# Altium PCB Power.PcbDoc (part 1 of 2)
Units mil, origin at the board's own origin, x right, y up, seen from the top; angles counter-clockwise.
Board outline 3000 x 2825 mil, 4 copper layers (Top Layer, Layer 1, Layer 2, Bottom Layer), stack 26.556 mil thick; 35 components, 15 nets, 160 pads, 64 vias.
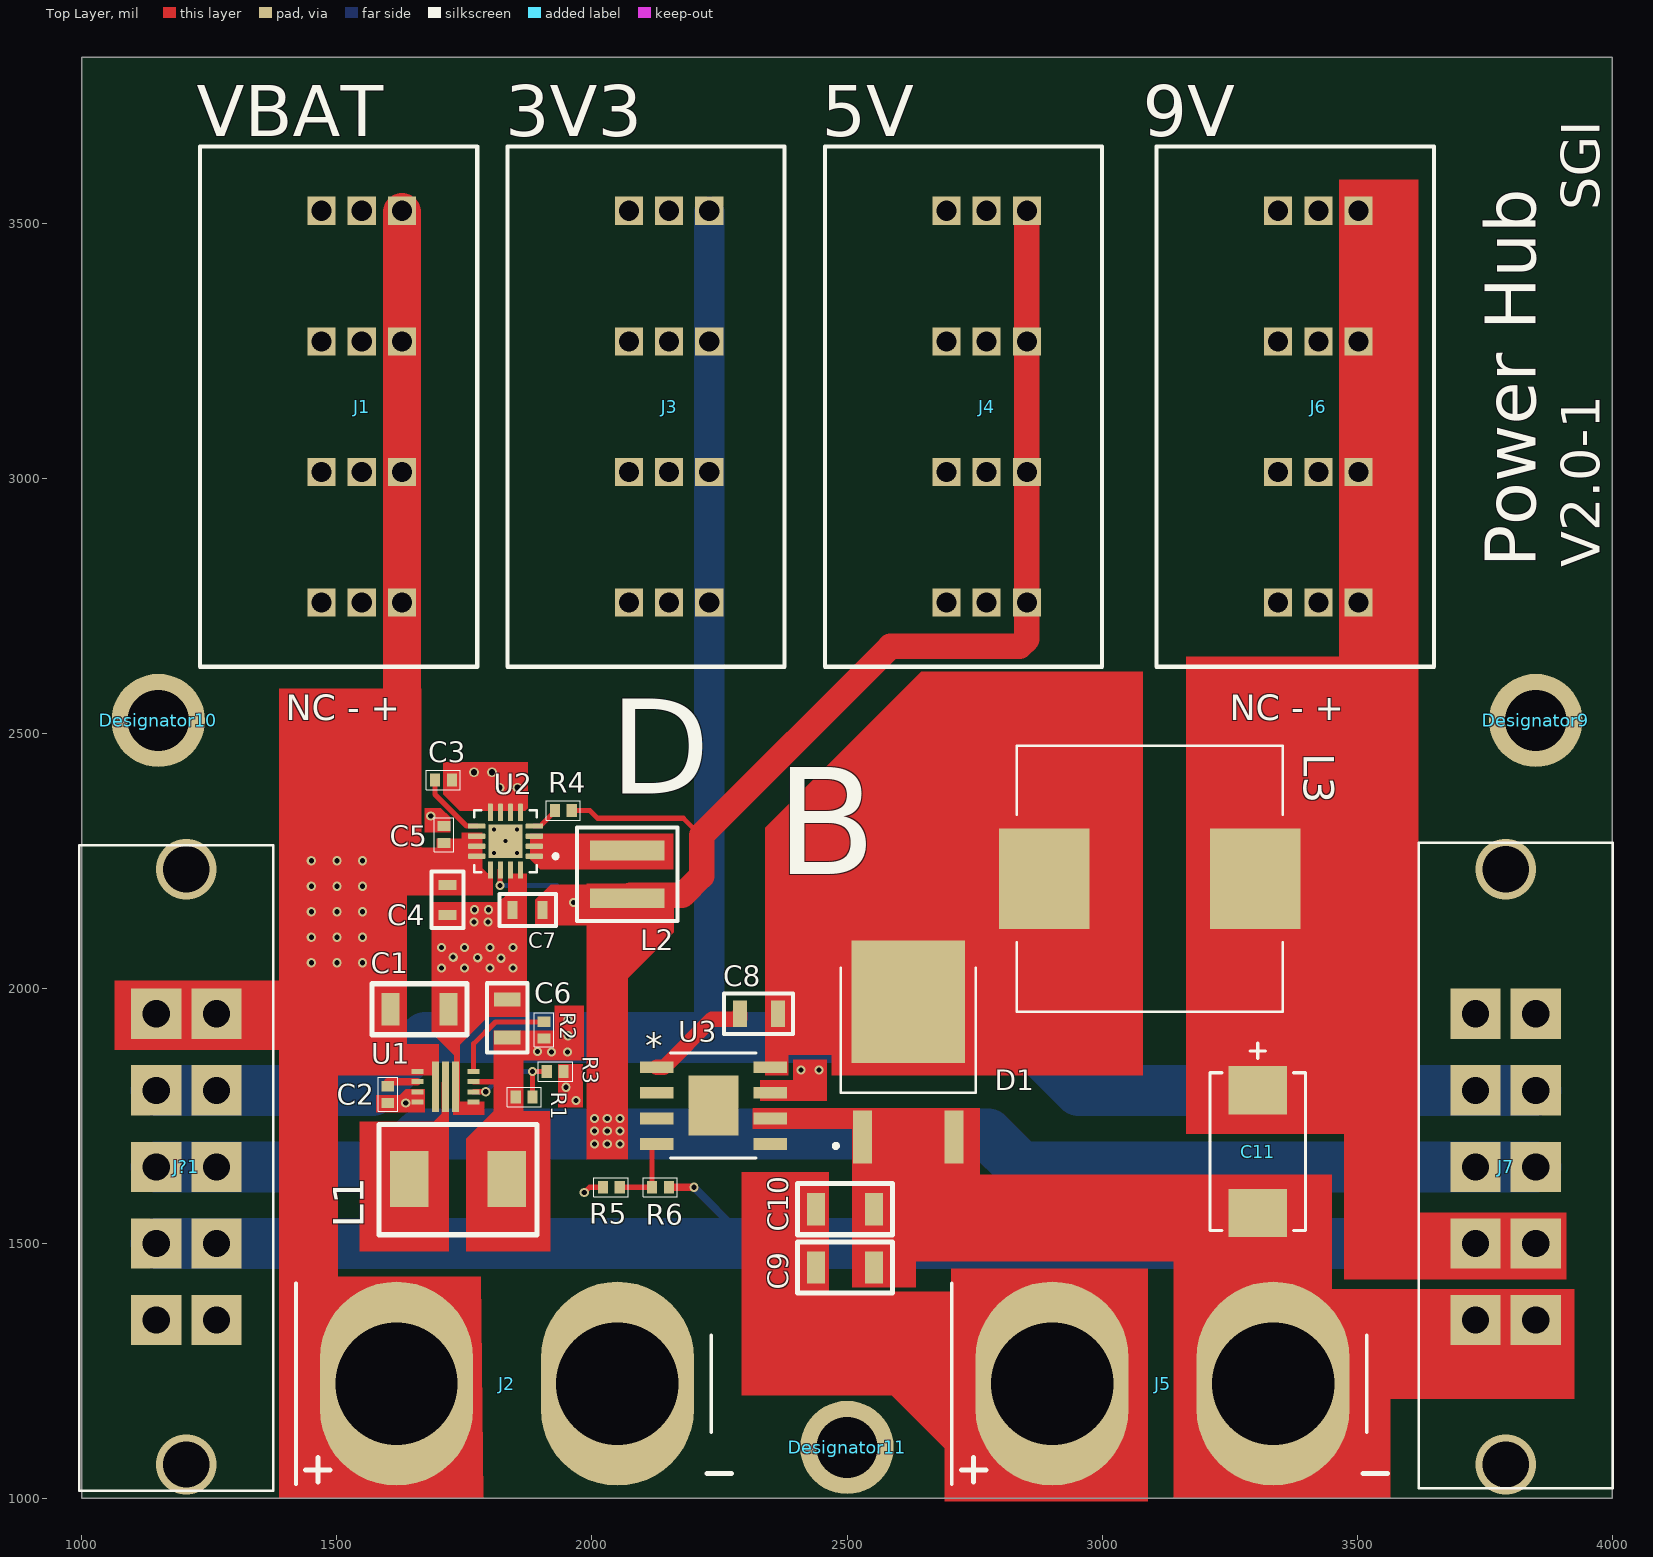
[diagram p0: Top Layer view]
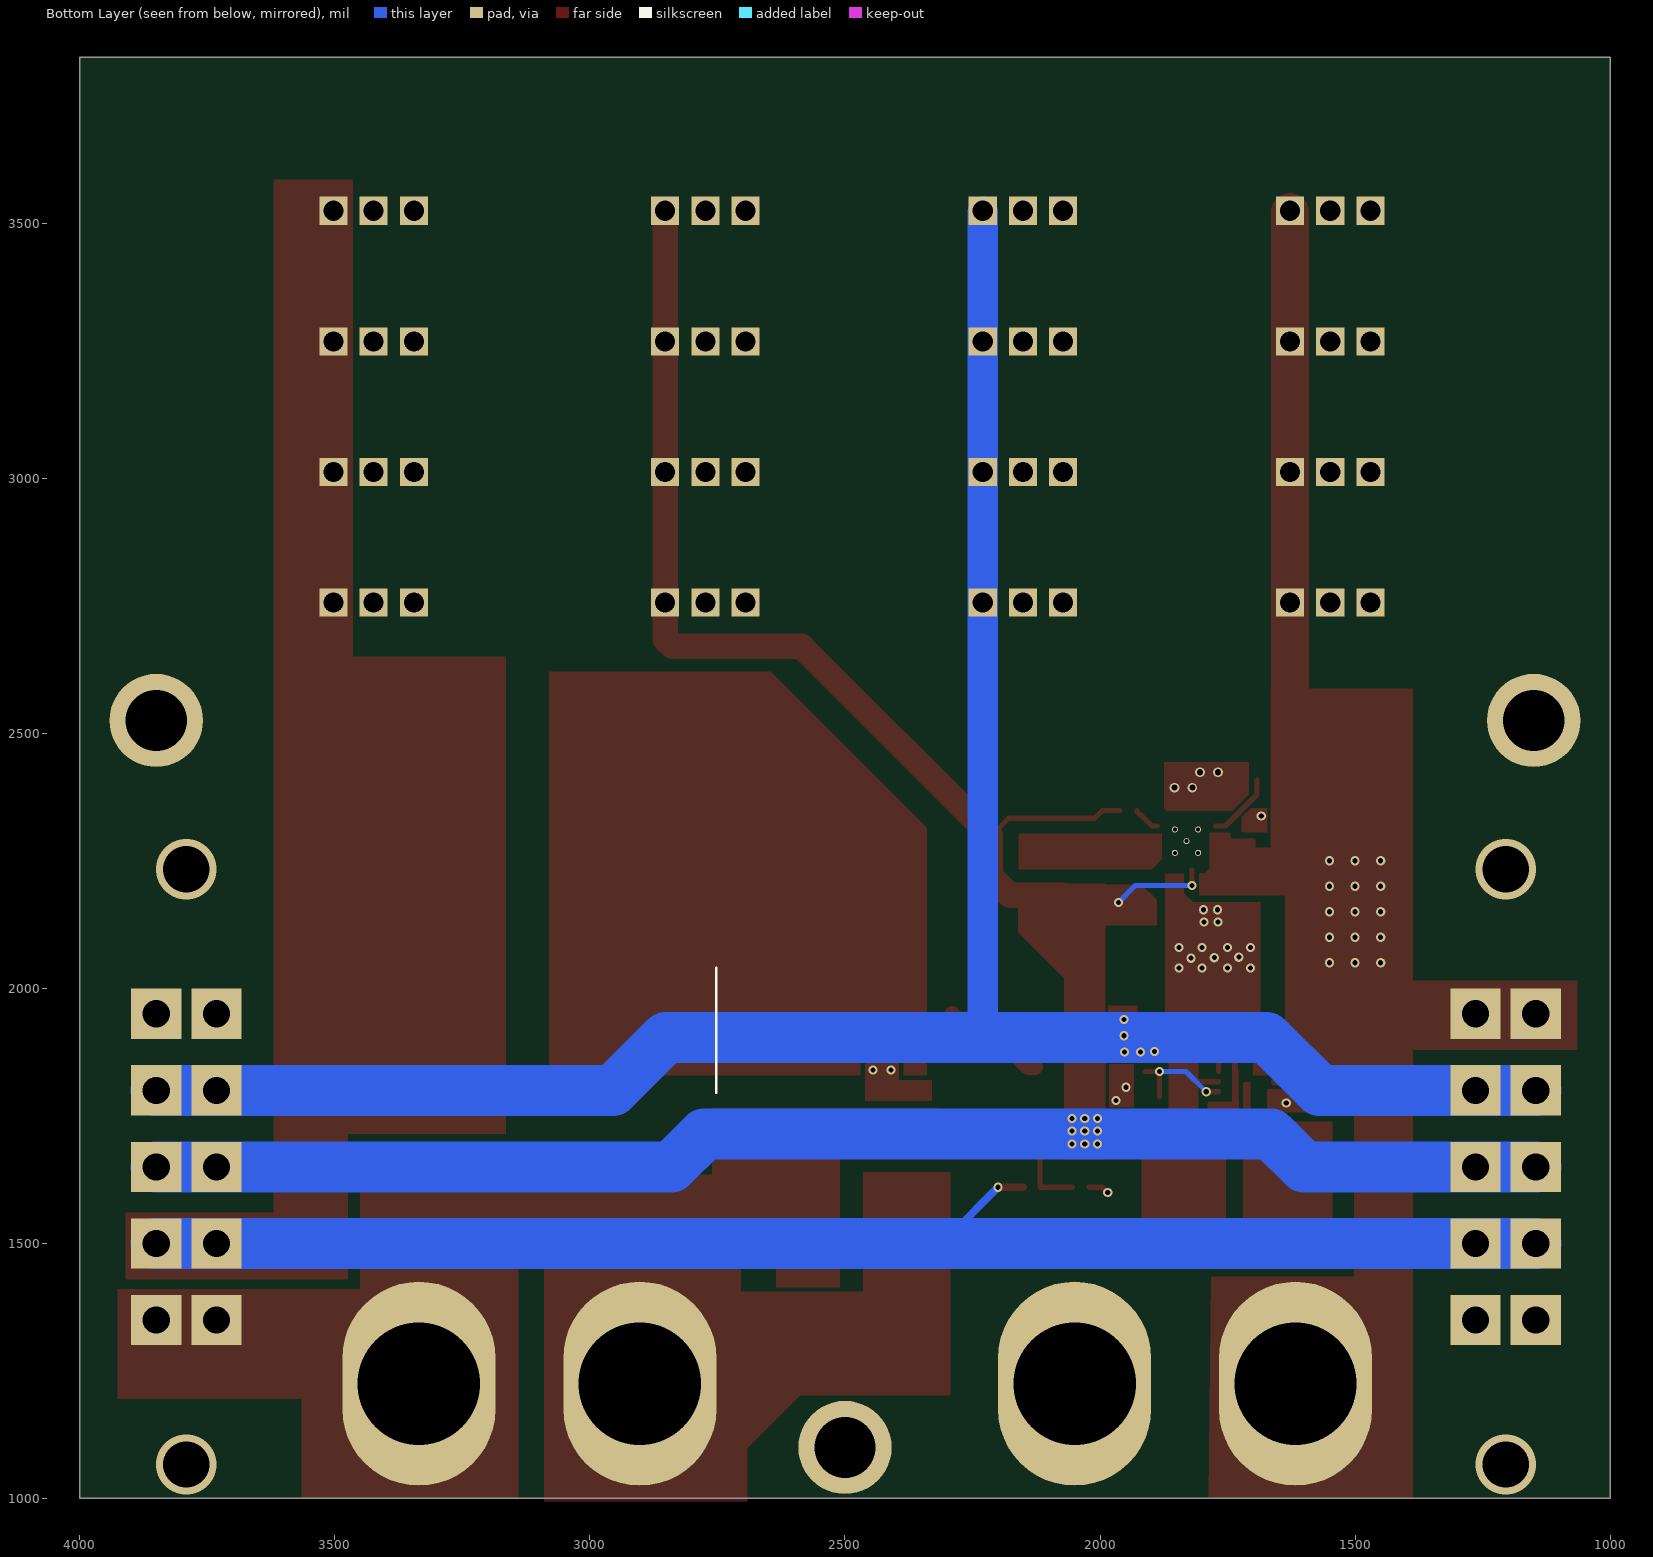
[diagram p1: Bottom Layer view, seen from below]
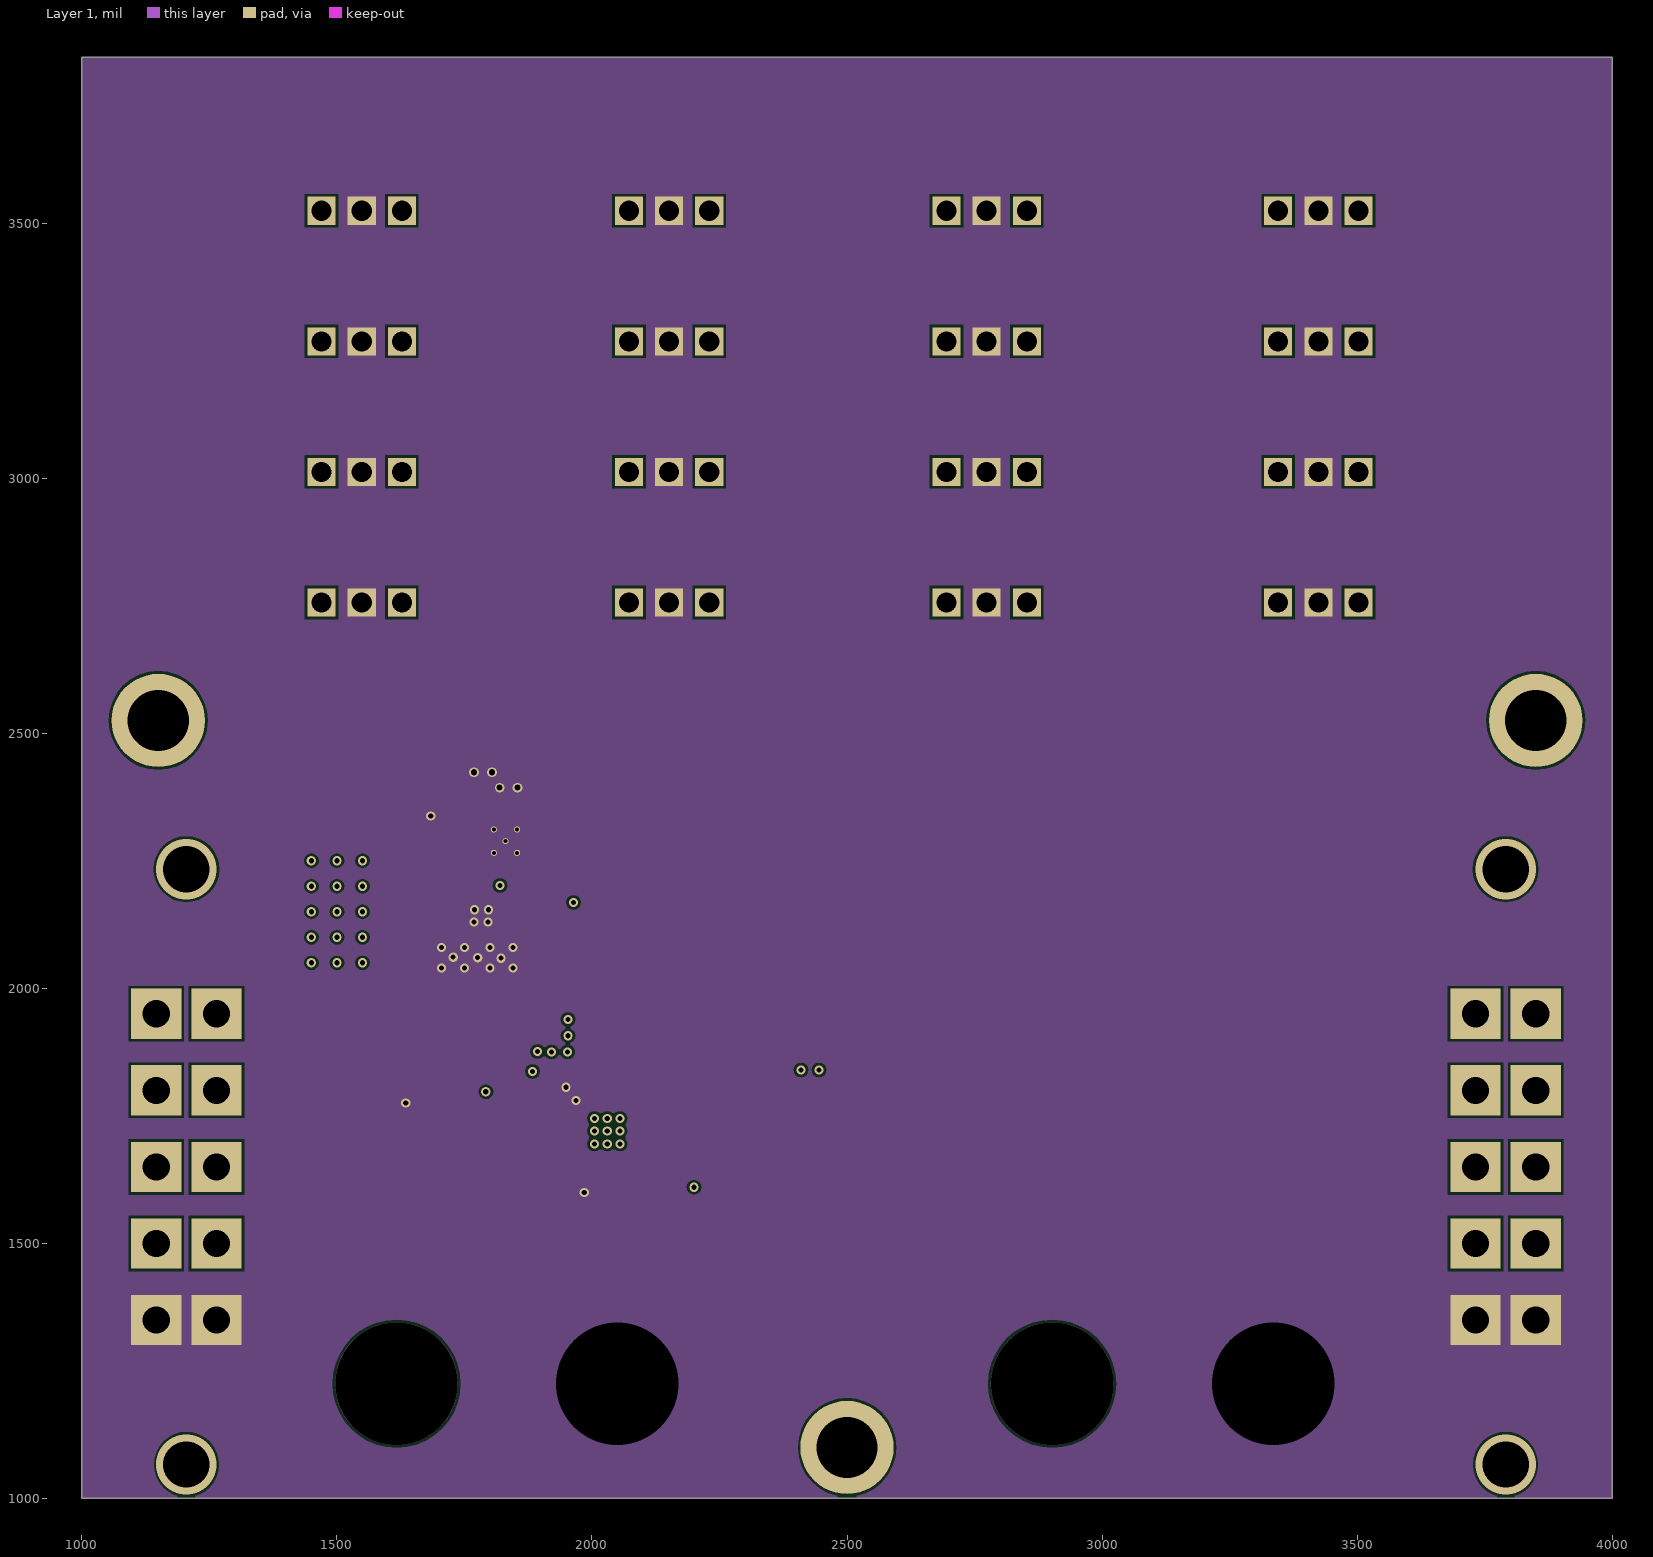
[diagram p2: Layer 1]
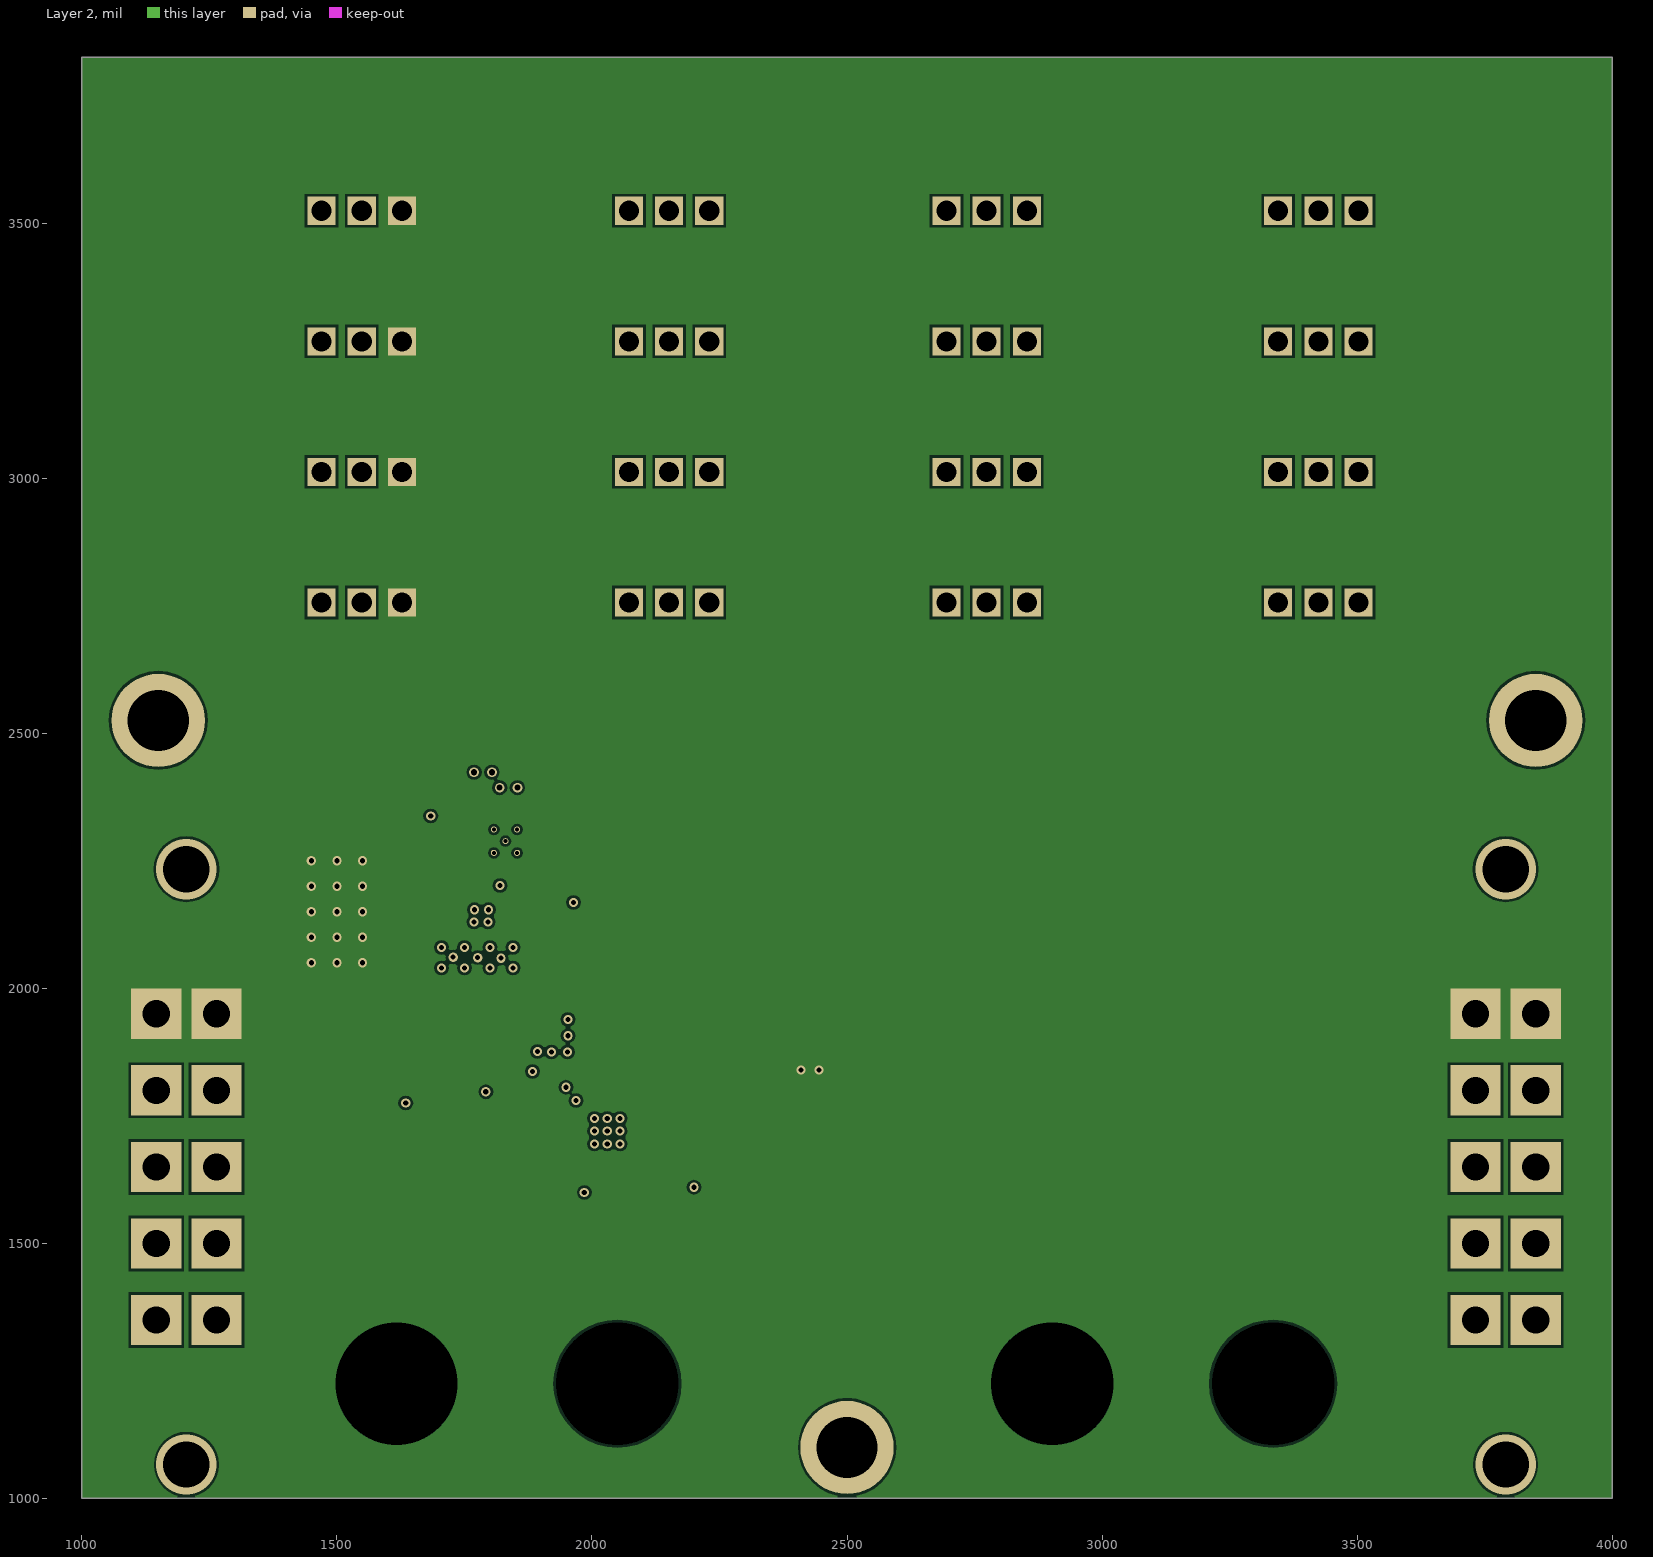
[diagram p3: Layer 2]
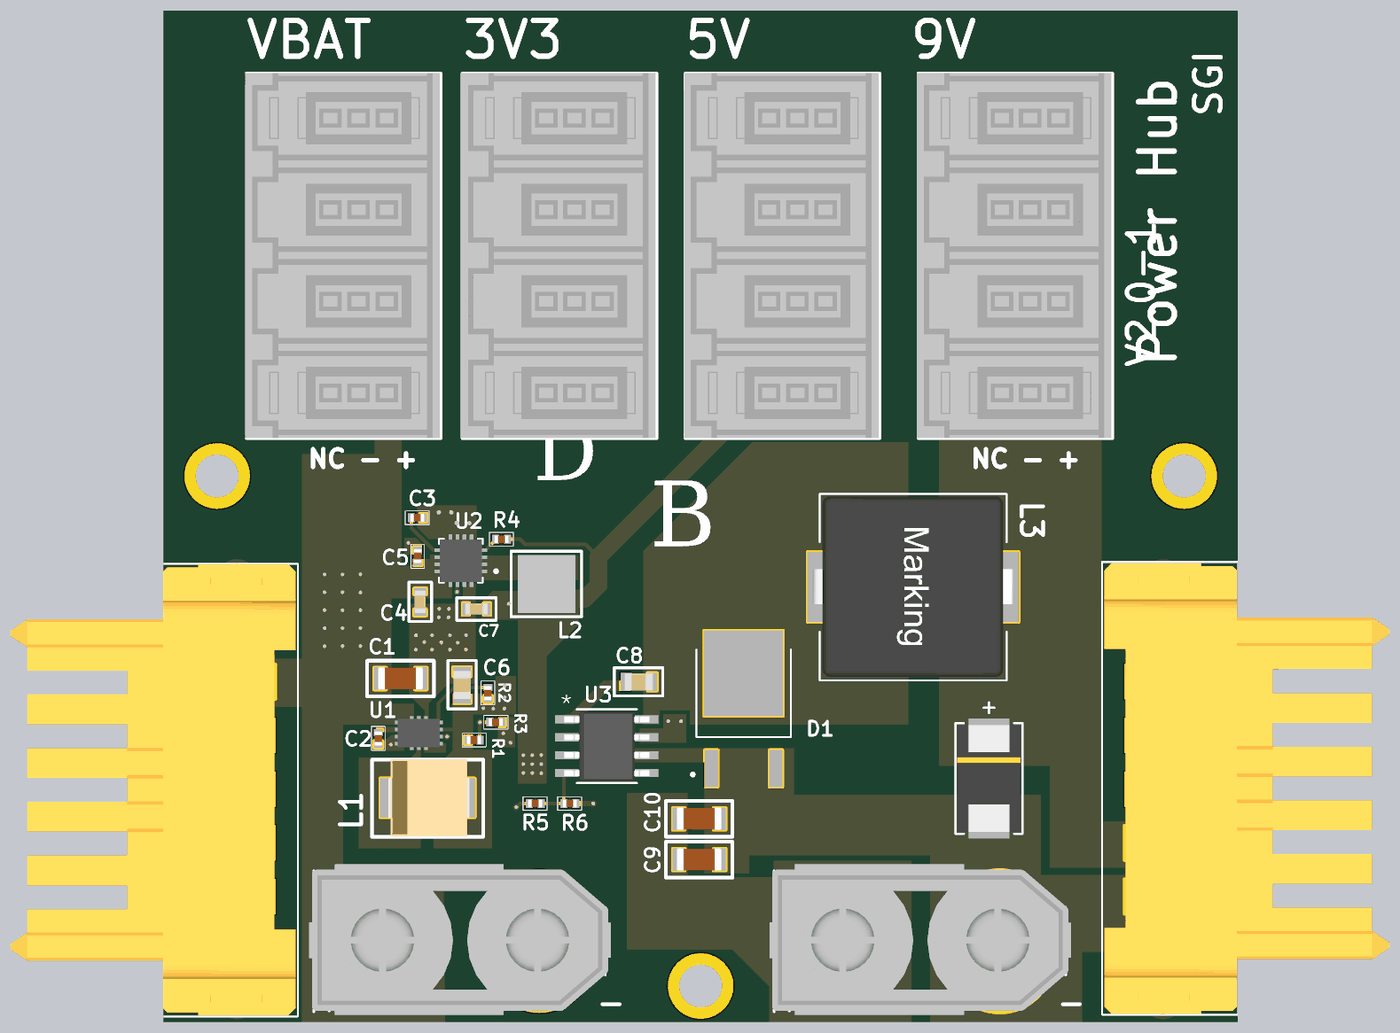
[diagram p4: 3D render of the assembled board from above, using the file's embedded part models]

## Layer stack, top to bottom
Top Solder: solder mask 0.4, Solder Resist, Dk 3.5
Top Layer: signal copper 2.8
Dielectric 2: prepreg 2.8, PP-006, Dk 4.1
Layer 1: signal copper 1.378
Dielectric 1: dielectric 12.6, FR-4, Dk 4.8
Layer 2: signal copper 1.378
Dielectric 3: prepreg 2.8, PP-006, Dk 4.1
Bottom Layer: signal copper 2.8
Bottom Solder: solder mask 0.4, Solder Resist, Dk 3.5

## Board outline
1000,3825 4000,3825 4000,1000 1000,1000

## Design rules (kind name [scope] priority, off if disabled: settings)
Clearance [All] p1: gap=5 ignorepadtopadclearanceinfootprint=FALSE except(0: Arc-Hole Track-Hole SMDPad-Hole THPad-Hole Via-Hole Fill-Hole Poly-Hole Region-Hole Text-Hole)
HoleSize [All] p1: absolutevalues=TRUE maxlimit=500 minlimit=1 maxpercent=80.000 minpercent=20.000
MinimumSolderMaskSliver [All] p1: minsoldermaskwidth=5
PlaneConnect [All] p1: planeconnectstyle=Direct reliefexpansion=20 reliefentries=4 reliefconductorwidth=10 reliefairgap=10
PolygonConnect [All] p1: connectstyle=Direct reliefconductorwidth=10 reliefentries=4 polygonreliefangle="90 Angle" airgapwidth=10
RoutingVias [All] p1: holewidth=28 width=50 viastyle="Through Hole" minholewidth=28 minwidth=50 maxholewidth=28 maxwidth=50
SilkToSilkClearance [All] p1: silktosilkclearance=5
SilkToSolderMaskClearance [IsPad] p1: minsilkscreentomaskgap=5 clearancetoexposedcopper=TRUE
SolderMaskExpansion [All] p1: expansion=4
Width [All] p1: maxlimit=200 minlimit=10 preferedwidth=10
25 further rules are at their usual default settings.

## Classes and differential pairs
component class U_9V_Switch: C8 C9 C11 D1 L3 R6 U3
component class U_5V_Switch: C3 C5 L2 R4 U2
component class U_3V_Switch: C2 C6 L1 R1 R2 R3 U1
component class Top: J2 J3 J5 J6 J?1

## Components (designator, comment, footprint, x,y, rotation, side; value= is the part's Value field where it differs from the comment)
C1 "10uF" 1206 1662,1959 r180 top (schematic designator C2)
C2 "2.2nF" 0402 1600,1791.54 r90 top (schematic designator C3)
C3 "620pF" 0402 1709,2408.35 r180 top (schematic designator C7)
C4 "10uF" 0603 1717,2173.35 r90 top (schematic designator C5)
C5 ".1uF" 0402 1710,2301.35 r270 top (schematic designator C6)
C6 "22uF" 0805 1834,1941 r270 top (schematic designator C1)
C7 "22uF" 0603 1874,2153.35 r0 top (schematic designator C4)
C8 "10nF" 0805 2327.4,1950 r0 top
C9 "10uF" 1206 2496,1453 r180 top
C10 "10uF" 1206 2496,1567 r180 top
C11 "150 uF" PCAP_TPB_D3L_PAN 3305,1680 r270 top
D1 "SBRD10200TR" SBRD10200TR 2620,1875 r0 top
Designator9 "Comment" "4-40 THRU"#1 3850,2525 r0 top
Designator10 "Comment" "4-40 THRU"#1 1150,2525 r0 top
Designator11 "Comment" "4-40 THRU"#2 2516,1110 r0 top
J1 "PWR4x1V" 37212-62M3-003PL 1231.81,3650 r270 top (schematic designator J7)
J2 "XT90 Conn" XT90 1616.93,1225 r0 top
J3 "PWR4x1V" 37212-62M3-003PL 1834.33,3650 r270 top (schematic designator J4)
J4 "PWR4x1V" 37212-62M3-003PL 2456.81,3650 r270 top (schematic designator J5)
J5 "XT90 Conn" XT90 2901.93,1225 r0 top (schematic designator J1)
J6 "PWR4x1V" 37212-62M3-003PL 3106.81,3650 r270 top
J7 "JPower" FX30B-5P-3.81DS 3790.94,1650 r90 top (schematic designator J3)
J?1 "JPower" FX30B-5P-3.81DS 1205,1650 r270 top (schematic designator J?)
L1 "1.5uH" IHLP-2020CZ-01 1737.5,1625.84 r0 top
L2 "2.2uH" 74438357022 2069,2223.35 r270 top
L3 "15.4uH" 7443551151 3093.31,2215 r0 top
R1 "374K" 0402 1867,1787 r0 top
R2 "100K" 0402 1906,1918 r90 top
R3 "100K" 0402 1928,1837 r0 top
R4 "100K" 0402 1944,2348.35 r180 top
R5 "1.58K" 0402 2038,1610 r180 top (schematic designator R6)
R6 "10K" 0402 2134.54,1610 r180 top (schematic designator R5)
U1 "TPS621361RGXR" RGX0011A 1713,1807 r90 top
U2 "TPS62133AQRGTRQ1" QFN50P300X300X100-17N 1830.54,2288.35 r180 top
U3 "TPS5450QDDARQ1" DDA8_3X2P49 2238,1770 r0 top

## Footprints (in the part's own frame and the unit in brackets; to place one, negate y for a bottom-side part, rotate by r counter-clockwise, add the part's x,y. Pads: shape width x height; smd on the part's side, far side on the other; paste and mask are expansions set on the pad)
"4-40 THRU"#1 [mil]
  round 183 hole 120: 1(0,0)
"4-40 THRU"#2 [mil]
  round 183 hole 120: 1(-16,-10)
0402 [mm]
  rect 0.508x0.63 smd: 1(-0.42,0) 2(0.42,0)
  silkscreen extent -0.84,-0.48 0.86,0.48, body extent -0.5,-0.28 0.5,0.28, height 0.51
0603 [mm]
  rect 0.5x0.9 smd: 1(-0.75,0) 2(0.75,0)
  silkscreen extent -1.4,-0.8 1.4,0.8, body extent -0.8,-0.4 0.8,0.4, height 0.81
0805 [mm]
  rect 0.7x1.3 smd: 1(-0.95,0) 2(0.95,0)
  silkscreen extent -1.75,-1 1.7,1, body extent -1,-0.63 1,0.62, height 0.61
1206 [mil]
  rect 35x63 smd: 1(-57,0) 2(57,0)
  silkscreen extent -93,-50 93,50, body extent -63,-32 63,31, height 63
37212-62M3-003PL [mm]
  rect 1.398x1.398 hole 1: 1(3.2,10.05) 2(3.2,8.05) 3(3.2,6.05) 4(9.7,10.05) 5(9.7,8.05) 6(9.7,6.05) 7(16.2,10.05) 8(16.2,8.05) 9(16.2,6.05) 10(22.7,10.05) 11(22.7,8.05) 12(22.7,6.05)
  silkscreen extent 0,0 25.9,13.8, body extent -0.02,-0.1 25.88,13.7, height 13.01
7443551151 [mm]
  rect 4.5x5 smd: 1(-5.25,0) 2(5.25,0)
  silkscreen extent -6.63,-6.63 6.63,6.6, body extent -7.13,-6.37 7.07,6.43, height 6.21
74438357022 [mm]
  rect 0.98x3.7 smd: 1(-1.185,0) 2(1.185,0)
  silkscreen extent -2.32,-2.5 2.33,2.5, body extent -2.05,-2.02 2.05,2.08, height 3.11
DDA8_3X2P49 [mil]
  rect 65.5x23 smd paste+0 mask+0: 1(-111.25,75) 2(-111.25,25) 3(-111.25,-25) 4(-111.25,-75) 5(111.25,-75) 6(111.25,-25) 7(111.25,25) 8(111.25,75)
  rect 98x118 smd paste-58.5 mask+0: EPAD(0,0)
  silkscreen extent -84,-103 84,103, body extent -119,-96 119,96, height 58
FX30B-5P-3.81DS [mm]
  rect 2.5x2.5 hole 1.35: 1(-7.62,-1.5) 1(-7.62,1.5) 2(-3.81,-1.5) 2(-3.81,1.5) 3(0,1.5) 3(0,-1.5) 4(3.81,-1.5) 4(3.81,1.5) 5(7.62,-1.5) 5(7.62,1.5)
  silkscreen extent -16,-5.33 16.13,4.32, body extent -15.95,-16.03 16.05,4.17, height 11.02
IHLP-2020CZ-01 [mil]
  rect 75x110 smd: 1(-95.5,0) 2(95.5,0)
  silkscreen extent -155,-109 155,107, body extent -109,-107 117,107, height 120
PCAP_TPB_D3L_PAN [mil]
  rect 94.5x114 smd paste+0 mask+0: 1(-120.25,0) 2(120.25,0)
  silkscreen extent -212,-94 155,94, body extent -149,-89 149,89, height 118
QFN50P300X300X100-17N [mm]
  rrect25% 0.86x0.26 smd mask+0: 1(-1.435,0.75) 2(-1.435,0.25) 3(-1.435,-0.25) 4(-1.435,-0.75) 9(1.435,-0.75) 10(1.435,-0.25) 11(1.435,0.25) 12(1.435,0.75)
  rrect25% 0.26x0.86 smd mask+0: 5(-0.75,-1.435) 6(-0.25,-1.435) 7(0.25,-1.435) 8(0.75,-1.435) 13(0.75,1.435) 14(0.25,1.435) 15(-0.25,1.435) 16(-0.75,1.435)
  rect 1.68x1.68 smd paste-2 mask+0: 17(0,0)
  round 0.3 hole 0.2: 17_1(0,0) 17_2(0.58,0.58) 17_3(0.58,-0.58) 17_4(-0.58,-0.58) 17_5(-0.58,0.58)
  silkscreen extent -2.59,-1.55 1.55,1.55, body extent -1.5,-1.5 1.5,1.5, height 1.01
RGX0011A [mm]
  rect 2.5x0.35 smd paste-1.237 mask-0.051: 1(0,0.5) 2(0,0) 3(0,-0.5)
  rect 0.25x0.6 smd paste+0 mask+0: 4(-0.75,-1.4) 5(-0.25,-1.4) 6(0.25,-1.4) 7(0.75,-1.4) 8(0.75,1.4) 9(0.25,1.4) 10(-0.25,1.4) 11(-0.75,1.4)
  body extent -1,-1.5 1,1.5, height 1.01
SBRD10200TR [mm]
  rect 0.95x2.64 smd: 1(-2.286,-4.24) 3(2.286,-4.24)
  rect 5.63x6.09 smd: 2(0,2.51)
  silkscreen extent -3.71,-4.77 3.35,4.19
XT90 [mil]
  oval 300x400 / inner round 50 / far side oval 300x400 hole 240: 1(0,0)
  oval 300x400 / inner round 150 / far side oval 300x400 hole 240: 2(433.07,0)
  silkscreen extent -197,-197 657,197, body extent -210,-206 633,216, height 827

## Part data
C1 C9 C10: library part GRM31CR71E106KA12L, "CAP CER 10UF 25V X7R 1206", Case/Package=0603, Case Code (Metric)=1608, Dielectric=X5R, Dielectric Material=Ceramic, Max Operating Temperature=85°C, Min Operating Temperature=-55°C, Package Quantity=1, Supplier Part Number 1=490-6518-1-ND, Tolerance=20%, Voltage Rating=25V, Capacitance=10uF, Case Code (Imperial)=0603, ComponentLink1Description=http://components.arrow.com/part/dataview/0323_06887183?src-supplier=Arrow+Europe, ComponentLink1URL=http://components.arrow.com/part/dataview/0323_06887183?src-supplier=Arrow+Europe, ComponentLink2Description=http://www.farnell.com/datasheets/2792994.pdf?src-supplier=Farnell, ComponentLink2URL=http://www.farnell.com/datasheets/2792994.pdf?src-supplier=Farnell, ComponentLink3Description=http://www.farnell.com/datasheets/2291921.pdf?src-supplier=Avnet, ComponentLink3URL=http://www.farnell.com/datasheets/2291921.pdf?src-supplier=Avnet, ComponentLink4Description=http://www.farnell.com/datasheets/2792994.pdf?src-supplier=Newark, ComponentLink4URL=http://www.farnell.com/datasheets/2792994.pdf?src-supplier=Newark, ComponentLink5Description=http://www.farnell.com/datasheets/2291921.pdf?src-supplier=Newark, ComponentLink5URL=http://www.farnell.com/datasheets/2291921.pdf?src-supplier=Newark, ComponentLink6Description=http://www.farnell.com/datasheets/2792994.pdf?src-supplier=Element14, ComponentLink6URL=http://www.farnell.com/datasheets/2792994.pdf?src-supplier=Element14, ComponentLink7Description=http://www.farnell.com/datasheets/1913358.pdf?src-supplier=Element14, ComponentLink7URL=http://www.farnell.com/datasheets/1913358.pdf?src-supplier=Element14, ComponentLink8Description=https://product.tdk.com/info/en/catalog/datasheets/mlcc_commercial_general_en.pdf?src-supplier=Digi-Key, ComponentLink8URL=https://product.tdk.com/info/en/catalog/datasheets/mlcc_commercial_general_en.pdf?src-supplier=Digi-Key, ComponentLink9Description=http://www.farnell.com/datasheets/2291921.pdf?src-supplier=RSComponents, ComponentLink9URL=http://www.farnell.com/datasheets/2291921.pdf?src-supplier=RSComponents, ComponentLink10Description=http://www.farnell.com/datasheets/2291921.pdf?src-supplier=Verical, ComponentLink10URL=http://www.farnell.com/datasheets/2291921.pdf?src-supplier=Verical, ComponentLink11Description=http://www.farnell.com/datasheets/2291921.pdf?src-supplier=Mouser, ComponentLink11URL=http://www.farnell.com/datasheets/2291921.pdf?src-supplier=Mouser, ComponentLink12Description=http://www.farnell.com/datasheets/2291921.pdf?src-supplier=Quest, ComponentLink12URL=http://www.farnell.com/datasheets/2291921.pdf?src-supplier=Quest, ComponentLink13Description=http://www.farnell.com/datasheets/2291921.pdf?src-supplier=TTI, ComponentLink13URL=http://www.farnell.com/datasheets/2291921.pdf?src-supplier=TTI, Composition=Ceramic, Depth=0.8mm, Height=0.8mm, Lead Free="Lead Free", Length=1.6mm, Mount="Surface Mount", Packaging="Tape and Reel", REACH SVHC="No SVHC", RoHS=Yes, Supplier 1=Digi-Key, Termination=SMD/SMT, Thickness=0.039inch, Voltage Rating (DC)=25V, Weight=7.1E-05oz, Width=0.8mm
C2: library part GRM155R71E222KA01D, "Cap Ceramic 0.0022uF 25V X7R 10% Pad SMD 0402 125C T/R", Case/Package=0402, Case Code (Metric)=1005, Dielectric=X7R, Manufacturer 1=Murata, Max Operating Temperature=125°C, Min Operating Temperature=-55°C, Package Quantity=1, Supplier Part Number 1=490-5419-1-ND, Tolerance=10%, Voltage=25V, Capacitance=2.2nF, Case Code (Imperial)=0402, ComponentLink1Description=https://datasheet.ciiva.com/16543/product-16543568.pdf?src-supplier=Avnet+Asia, ComponentLink1URL=https://datasheet.ciiva.com/16543/product-16543568.pdf?src-supplier=Avnet+Asia, ComponentLink2Description=https://datasheet.ciiva.com/18184/getdatasheetpartid-476555-18184699.pdf?src-supplier=Verical, ComponentLink2URL=https://datasheet.ciiva.com/18184/getdatasheetpartid-476555-18184699.pdf?src-supplier=Verical, ComponentLink3Description=https://datasheet.ciiva.com/129/partnumbering-e-01-129987.pdf?src-supplier=Digi-Key, ComponentLink3URL=https://datasheet.ciiva.com/129/partnumbering-e-01-129987.pdf?src-supplier=Digi-Key, ComponentLink4Description=https://datasheet.ciiva.com/129/partnumbering-e-01-129988.pdf?src-supplier=Digi-Key, ComponentLink4URL=https://datasheet.ciiva.com/129/partnumbering-e-01-129988.pdf?src-supplier=Digi-Key, ComponentLink5Description=https://datasheet.ciiva.com/129/partnumbering-e-01-129989.pdf?src-supplier=Digi-Key, ComponentLink5URL=https://datasheet.ciiva.com/129/partnumbering-e-01-129989.pdf?src-supplier=Digi-Key, ComponentLink6Description=https://datasheet.ciiva.com/16396/product-16396812.pdf?src-supplier=Future+Electronics, ComponentLink6URL=https://datasheet.ciiva.com/16396/product-16396812.pdf?src-supplier=Future+Electronics, Depth=0.5mm, Height=0.5mm, Lead Free="Lead Free", Length=1mm, Manufacturer Part Number 1=GRM155R71E222KA01D, Mount="Surface Mount", Packaging="Tape and Reel", Pricing 1="1=0.10000, 10=0.03200, 100=0.01430, 500=0.01020, 1000=0.00802, 2500=0.00729, 5000=0.00670 (USD)", Radiation Hardening=No, REACH SVHC="No SVHC", RoHS=Yes, Stock 1=502487, Supplier 1=Digi-Key, Termination=SMD/SMT, Thickness=0.022inch, Voltage Rating=25V, Voltage Rating (DC)=25V, Width=0.02inch
C3: library part GRM1555C1E621JA01D, "CAP CER 620PF 25V C0G/NP0 0402", Capacitance=10uF, Case/Package=0603, Case Code (Metric)=1608, Dielectric=X5R, Dielectric Material=Ceramic, Max Operating Temperature=85°C, Min Operating Temperature=-55°C, Package Quantity=1, Supplier Part Number 1=490-6181-1-ND, Tolerance=20%, Voltage Rating=25V, Case Code (Imperial)=0603, ComponentLink1Description=http://components.arrow.com/part/dataview/0323_06887183?src-supplier=Arrow+Europe, ComponentLink1URL=http://components.arrow.com/part/dataview/0323_06887183?src-supplier=Arrow+Europe, ComponentLink2Description=http://www.farnell.com/datasheets/2792994.pdf?src-supplier=Farnell, ComponentLink2URL=http://www.farnell.com/datasheets/2792994.pdf?src-supplier=Farnell, ComponentLink3Description=http://www.farnell.com/datasheets/2291921.pdf?src-supplier=Avnet, ComponentLink3URL=http://www.farnell.com/datasheets/2291921.pdf?src-supplier=Avnet, ComponentLink4Description=http://www.farnell.com/datasheets/2792994.pdf?src-supplier=Newark, ComponentLink4URL=http://www.farnell.com/datasheets/2792994.pdf?src-supplier=Newark, ComponentLink5Description=http://www.farnell.com/datasheets/2291921.pdf?src-supplier=Newark, ComponentLink5URL=http://www.farnell.com/datasheets/2291921.pdf?src-supplier=Newark, ComponentLink6Description=http://www.farnell.com/datasheets/2792994.pdf?src-supplier=Element14, ComponentLink6URL=http://www.farnell.com/datasheets/2792994.pdf?src-supplier=Element14, ComponentLink7Description=http://www.farnell.com/datasheets/1913358.pdf?src-supplier=Element14, ComponentLink7URL=http://www.farnell.com/datasheets/1913358.pdf?src-supplier=Element14, ComponentLink8Description=https://product.tdk.com/info/en/catalog/datasheets/mlcc_commercial_general_en.pdf?src-supplier=Digi-Key, ComponentLink8URL=https://product.tdk.com/info/en/catalog/datasheets/mlcc_commercial_general_en.pdf?src-supplier=Digi-Key, ComponentLink9Description=http://www.farnell.com/datasheets/2291921.pdf?src-supplier=RSComponents, ComponentLink9URL=http://www.farnell.com/datasheets/2291921.pdf?src-supplier=RSComponents, ComponentLink10Description=http://www.farnell.com/datasheets/2291921.pdf?src-supplier=Verical, ComponentLink10URL=http://www.farnell.com/datasheets/2291921.pdf?src-supplier=Verical, ComponentLink11Description=http://www.farnell.com/datasheets/2291921.pdf?src-supplier=Mouser, ComponentLink11URL=http://www.farnell.com/datasheets/2291921.pdf?src-supplier=Mouser, ComponentLink12Description=http://www.farnell.com/datasheets/2291921.pdf?src-supplier=Quest, ComponentLink12URL=http://www.farnell.com/datasheets/2291921.pdf?src-supplier=Quest, ComponentLink13Description=http://www.farnell.com/datasheets/2291921.pdf?src-supplier=TTI, ComponentLink13URL=http://www.farnell.com/datasheets/2291921.pdf?src-supplier=TTI, Composition=Ceramic, Depth=0.8mm, Height=0.8mm, Lead Free="Lead Free", Length=1.6mm, Mount="Surface Mount", Packaging="Tape and Reel", REACH SVHC="No SVHC", RoHS=Yes, Supplier 1=Digi-Key, Termination=SMD/SMT, Thickness=0.039inch, Voltage Rating (DC)=25V, Weight=7.1E-05oz, Width=0.8mm
C4: library part C1608X5R1E106M080AC, "CAP CER 10UF 25V X5R 0603", Case/Package=0603, Case Code (Metric)=1608, Dielectric=X5R, Dielectric Material=Ceramic, Manufacturer 1=TDK, Max Operating Temperature=85°C, Min Operating Temperature=-55°C, Package Quantity=1, Supplier Part Number 1=445-9015-1-ND, Tolerance=20%, Voltage Rating=25V, Capacitance=10uF, Case Code (Imperial)=0603, ComponentLink1Description=http://components.arrow.com/part/dataview/0323_06887183?src-supplier=Arrow+Europe, ComponentLink1URL=http://components.arrow.com/part/dataview/0323_06887183?src-supplier=Arrow+Europe, ComponentLink2Description=http://www.farnell.com/datasheets/2792994.pdf?src-supplier=Farnell, ComponentLink2URL=http://www.farnell.com/datasheets/2792994.pdf?src-supplier=Farnell, ComponentLink3Description=http://www.farnell.com/datasheets/2291921.pdf?src-supplier=Avnet, ComponentLink3URL=http://www.farnell.com/datasheets/2291921.pdf?src-supplier=Avnet, ComponentLink4Description=http://www.farnell.com/datasheets/2792994.pdf?src-supplier=Newark, ComponentLink4URL=http://www.farnell.com/datasheets/2792994.pdf?src-supplier=Newark, ComponentLink5Description=http://www.farnell.com/datasheets/2291921.pdf?src-supplier=Newark, ComponentLink5URL=http://www.farnell.com/datasheets/2291921.pdf?src-supplier=Newark, ComponentLink6Description=http://www.farnell.com/datasheets/2792994.pdf?src-supplier=Element14, ComponentLink6URL=http://www.farnell.com/datasheets/2792994.pdf?src-supplier=Element14, ComponentLink7Description=http://www.farnell.com/datasheets/1913358.pdf?src-supplier=Element14, ComponentLink7URL=http://www.farnell.com/datasheets/1913358.pdf?src-supplier=Element14, ComponentLink8Description=https://product.tdk.com/info/en/catalog/datasheets/mlcc_commercial_general_en.pdf?src-supplier=Digi-Key, ComponentLink8URL=https://product.tdk.com/info/en/catalog/datasheets/mlcc_commercial_general_en.pdf?src-supplier=Digi-Key, ComponentLink9Description=http://www.farnell.com/datasheets/2291921.pdf?src-supplier=RSComponents, ComponentLink9URL=http://www.farnell.com/datasheets/2291921.pdf?src-supplier=RSComponents, ComponentLink10Description=http://www.farnell.com/datasheets/2291921.pdf?src-supplier=Verical, ComponentLink10URL=http://www.farnell.com/datasheets/2291921.pdf?src-supplier=Verical, ComponentLink11Description=http://www.farnell.com/datasheets/2291921.pdf?src-supplier=Mouser, ComponentLink11URL=http://www.farnell.com/datasheets/2291921.pdf?src-supplier=Mouser, ComponentLink12Description=http://www.farnell.com/datasheets/2291921.pdf?src-supplier=Quest, ComponentLink12URL=http://www.farnell.com/datasheets/2291921.pdf?src-supplier=Quest, ComponentLink13Description=http://www.farnell.com/datasheets/2291921.pdf?src-supplier=TTI, ComponentLink13URL=http://www.farnell.com/datasheets/2291921.pdf?src-supplier=TTI, Composition=Ceramic, Depth=0.8mm, Height=0.8mm, Lead Free="Lead Free", Length=1.6mm, Manufacturer Part Number 1=C1608X5R1E106M080AC, Mount="Surface Mount", Packaging="Tape and Reel", Pricing 1="1=0.84000, 10=0.62000, 100=0.42500, 500=0.33650, 1000=0.28336 (USD)", REACH SVHC="No SVHC", RoHS=Yes, Stock 1=307531, Supplier 1=Digi-Key, Termination=SMD/SMT, Thickness=0.039inch, Voltage Rating (DC)=25V, Weight=7.1E-05oz, Width=0.8mm
C5: library part GRM155R71C104KA88D, "CAP CER 0.1UF 16V X7R 0402", Capacitance=10uF, Case/Package=0603, Case Code (Metric)=1608, Dielectric=X5R, Dielectric Material=Ceramic, Max Operating Temperature=85°C, Min Operating Temperature=-55°C, Package Quantity=1, Supplier Part Number 1=490-3261-6-ND, Tolerance=20%, Voltage Rating=25V, Case Code (Imperial)=0603, ComponentLink1Description=http://components.arrow.com/part/dataview/0323_06887183?src-supplier=Arrow+Europe, ComponentLink1URL=http://components.arrow.com/part/dataview/0323_06887183?src-supplier=Arrow+Europe, ComponentLink2Description=http://www.farnell.com/datasheets/2792994.pdf?src-supplier=Farnell, ComponentLink2URL=http://www.farnell.com/datasheets/2792994.pdf?src-supplier=Farnell, ComponentLink3Description=http://www.farnell.com/datasheets/2291921.pdf?src-supplier=Avnet, ComponentLink3URL=http://www.farnell.com/datasheets/2291921.pdf?src-supplier=Avnet, ComponentLink4Description=http://www.farnell.com/datasheets/2792994.pdf?src-supplier=Newark, ComponentLink4URL=http://www.farnell.com/datasheets/2792994.pdf?src-supplier=Newark, ComponentLink5Description=http://www.farnell.com/datasheets/2291921.pdf?src-supplier=Newark, ComponentLink5URL=http://www.farnell.com/datasheets/2291921.pdf?src-supplier=Newark, ComponentLink6Description=http://www.farnell.com/datasheets/2792994.pdf?src-supplier=Element14, ComponentLink6URL=http://www.farnell.com/datasheets/2792994.pdf?src-supplier=Element14, ComponentLink7Description=http://www.farnell.com/datasheets/1913358.pdf?src-supplier=Element14, ComponentLink7URL=http://www.farnell.com/datasheets/1913358.pdf?src-supplier=Element14, ComponentLink8Description=https://product.tdk.com/info/en/catalog/datasheets/mlcc_commercial_general_en.pdf?src-supplier=Digi-Key, ComponentLink8URL=https://product.tdk.com/info/en/catalog/datasheets/mlcc_commercial_general_en.pdf?src-supplier=Digi-Key, ComponentLink9Description=http://www.farnell.com/datasheets/2291921.pdf?src-supplier=RSComponents, ComponentLink9URL=http://www.farnell.com/datasheets/2291921.pdf?src-supplier=RSComponents, ComponentLink10Description=http://www.farnell.com/datasheets/2291921.pdf?src-supplier=Verical, ComponentLink10URL=http://www.farnell.com/datasheets/2291921.pdf?src-supplier=Verical, ComponentLink11Description=http://www.farnell.com/datasheets/2291921.pdf?src-supplier=Mouser, ComponentLink11URL=http://www.farnell.com/datasheets/2291921.pdf?src-supplier=Mouser, ComponentLink12Description=http://www.farnell.com/datasheets/2291921.pdf?src-supplier=Quest, ComponentLink12URL=http://www.farnell.com/datasheets/2291921.pdf?src-supplier=Quest, ComponentLink13Description=http://www.farnell.com/datasheets/2291921.pdf?src-supplier=TTI, ComponentLink13URL=http://www.farnell.com/datasheets/2291921.pdf?src-supplier=TTI, Composition=Ceramic, Depth=0.8mm, Height=0.8mm, Lead Free="Lead Free", Length=1.6mm, Mount="Surface Mount", Packaging="Tape and Reel", REACH SVHC="No SVHC", RoHS=Yes, Supplier 1=Digi-Key, Termination=SMD/SMT, Thickness=0.039inch, Voltage Rating (DC)=25V, Weight=7.1E-05oz, Width=0.8mm
C6: library part GRM21BD70J226ME44L, "CAP CER 22UF 6.3V X7T 0805", Capacitance=10uF, Case/Package=0603, Case Code (Metric)=1608, Dielectric=X5R, Dielectric Material=Ceramic, Max Operating Temperature=85°C, Min Operating Temperature=-55°C, Package Quantity=1, Supplier Part Number 1=490-14659-1-ND, Tolerance=20%, Voltage Rating=25V, Case Code (Imperial)=0603, ComponentLink1Description=http://components.arrow.com/part/dataview/0323_06887183?src-supplier=Arrow+Europe, ComponentLink1URL=http://components.arrow.com/part/dataview/0323_06887183?src-supplier=Arrow+Europe, ComponentLink2Description=http://www.farnell.com/datasheets/2792994.pdf?src-supplier=Farnell, ComponentLink2URL=http://www.farnell.com/datasheets/2792994.pdf?src-supplier=Farnell, ComponentLink3Description=http://www.farnell.com/datasheets/2291921.pdf?src-supplier=Avnet, ComponentLink3URL=http://www.farnell.com/datasheets/2291921.pdf?src-supplier=Avnet, ComponentLink4Description=http://www.farnell.com/datasheets/2792994.pdf?src-supplier=Newark, ComponentLink4URL=http://www.farnell.com/datasheets/2792994.pdf?src-supplier=Newark, ComponentLink5Description=http://www.farnell.com/datasheets/2291921.pdf?src-supplier=Newark, ComponentLink5URL=http://www.farnell.com/datasheets/2291921.pdf?src-supplier=Newark, ComponentLink6Description=http://www.farnell.com/datasheets/2792994.pdf?src-supplier=Element14, ComponentLink6URL=http://www.farnell.com/datasheets/2792994.pdf?src-supplier=Element14, ComponentLink7Description=http://www.farnell.com/datasheets/1913358.pdf?src-supplier=Element14, ComponentLink7URL=http://www.farnell.com/datasheets/1913358.pdf?src-supplier=Element14, ComponentLink8Description=https://product.tdk.com/info/en/catalog/datasheets/mlcc_commercial_general_en.pdf?src-supplier=Digi-Key, ComponentLink8URL=https://product.tdk.com/info/en/catalog/datasheets/mlcc_commercial_general_en.pdf?src-supplier=Digi-Key, ComponentLink9Description=http://www.farnell.com/datasheets/2291921.pdf?src-supplier=RSComponents, ComponentLink9URL=http://www.farnell.com/datasheets/2291921.pdf?src-supplier=RSComponents, ComponentLink10Description=http://www.farnell.com/datasheets/2291921.pdf?src-supplier=Verical, ComponentLink10URL=http://www.farnell.com/datasheets/2291921.pdf?src-supplier=Verical, ComponentLink11Description=http://www.farnell.com/datasheets/2291921.pdf?src-supplier=Mouser, ComponentLink11URL=http://www.farnell.com/datasheets/2291921.pdf?src-supplier=Mouser, ComponentLink12Description=http://www.farnell.com/datasheets/2291921.pdf?src-supplier=Quest, ComponentLink12URL=http://www.farnell.com/datasheets/2291921.pdf?src-supplier=Quest, ComponentLink13Description=http://www.farnell.com/datasheets/2291921.pdf?src-supplier=TTI, ComponentLink13URL=http://www.farnell.com/datasheets/2291921.pdf?src-supplier=TTI, Composition=Ceramic, Depth=0.8mm, Height=0.8mm, Lead Free="Lead Free", Length=1.6mm, Mount="Surface Mount", Packaging="Tape and Reel", REACH SVHC="No SVHC", RoHS=Yes, Supplier 1=Digi-Key, Termination=SMD/SMT, Thickness=0.039inch, Voltage Rating (DC)=25V, Weight=7.1E-05oz, Width=0.8mm
C7: library part C1608X5R1A226M080AC, "CAP CER 22UF 10V X5R 0603", Capacitance=10uF, Case/Package=0603, Case Code (Metric)=1608, Dielectric=X5R, Dielectric Material=Ceramic, Manufacturer 1=TDK, Max Operating Temperature=85°C, Min Operating Temperature=-55°C, Package Quantity=1, Supplier Part Number 1=445-9077-6-ND, Tolerance=20%, Voltage Rating=25V, Case Code (Imperial)=0603, ComponentLink1Description=http://components.arrow.com/part/dataview/0323_06887183?src-supplier=Arrow+Europe, ComponentLink1URL=http://components.arrow.com/part/dataview/0323_06887183?src-supplier=Arrow+Europe, ComponentLink2Description=http://www.farnell.com/datasheets/2792994.pdf?src-supplier=Farnell, ComponentLink2URL=http://www.farnell.com/datasheets/2792994.pdf?src-supplier=Farnell, ComponentLink3Description=http://www.farnell.com/datasheets/2291921.pdf?src-supplier=Avnet, ComponentLink3URL=http://www.farnell.com/datasheets/2291921.pdf?src-supplier=Avnet, ComponentLink4Description=http://www.farnell.com/datasheets/2792994.pdf?src-supplier=Newark, ComponentLink4URL=http://www.farnell.com/datasheets/2792994.pdf?src-supplier=Newark, ComponentLink5Description=http://www.farnell.com/datasheets/2291921.pdf?src-supplier=Newark, ComponentLink5URL=http://www.farnell.com/datasheets/2291921.pdf?src-supplier=Newark, ComponentLink6Description=http://www.farnell.com/datasheets/2792994.pdf?src-supplier=Element14, ComponentLink6URL=http://www.farnell.com/datasheets/2792994.pdf?src-supplier=Element14, ComponentLink7Description=http://www.farnell.com/datasheets/1913358.pdf?src-supplier=Element14, ComponentLink7URL=http://www.farnell.com/datasheets/1913358.pdf?src-supplier=Element14, ComponentLink8Description=https://product.tdk.com/info/en/catalog/datasheets/mlcc_commercial_general_en.pdf?src-supplier=Digi-Key, ComponentLink8URL=https://product.tdk.com/info/en/catalog/datasheets/mlcc_commercial_general_en.pdf?src-supplier=Digi-Key, ComponentLink9Description=http://www.farnell.com/datasheets/2291921.pdf?src-supplier=RSComponents, ComponentLink9URL=http://www.farnell.com/datasheets/2291921.pdf?src-supplier=RSComponents, ComponentLink10Description=http://www.farnell.com/datasheets/2291921.pdf?src-supplier=Verical, ComponentLink10URL=http://www.farnell.com/datasheets/2291921.pdf?src-supplier=Verical, ComponentLink11Description=http://www.farnell.com/datasheets/2291921.pdf?src-supplier=Mouser, ComponentLink11URL=http://www.farnell.com/datasheets/2291921.pdf?src-supplier=Mouser, ComponentLink12Description=http://www.farnell.com/datasheets/2291921.pdf?src-supplier=Quest, ComponentLink12URL=http://www.farnell.com/datasheets/2291921.pdf?src-supplier=Quest, ComponentLink13Description=http://www.farnell.com/datasheets/2291921.pdf?src-supplier=TTI, ComponentLink13URL=http://www.farnell.com/datasheets/2291921.pdf?src-supplier=TTI, ComponentLink14Description=https://datasheet.ciiva.com/6274/tdkmlcccaprange-6274859.pdf?src-supplier=Digi-Key, ComponentLink14URL=https://datasheet.ciiva.com/6274/tdkmlcccaprange-6274859.pdf?src-supplier=Digi-Key, ComponentLink15Description=https://datasheet.ciiva.com/6274/tdkmlcccaprange-6274860.pdf?src-supplier=Digi-Key, ComponentLink15URL=https://datasheet.ciiva.com/6274/tdkmlcccaprange-6274860.pdf?src-supplier=Digi-Key, ComponentLink16Description=https://datasheet.ciiva.com/6274/tdkmlcccaprange-6274861.pdf?src-supplier=Digi-Key, ComponentLink16URL=https://datasheet.ciiva.com/6274/tdkmlcccaprange-6274861.pdf?src-supplier=Digi-Key, ComponentLink17Description=https://datasheet.ciiva.com/24216/mlcc-commercial-general-en-24216575.pdf?src-supplier=Mouser, ComponentLink17URL=https://datasheet.ciiva.com/24216/mlcc-commercial-general-en-24216575.pdf?src-supplier=Mouser, Composition=Ceramic, Depth=0.8mm, Height=0.8mm, Lead Free="Lead Free", Length=1.6mm, Manufacturer Part Number 1=C1608X5R1A226M080AC, Mount="Surface Mount", Packaging="Tape and Reel", Pricing 1="1=0.50000, 10=0.35100, 100=0.23120, 500=0.17122, 1000=0.14554 (USD)", REACH SVHC="No SVHC", RoHS=Yes, Stock 1=310014, Supplier 1=Digi-Key, Termination=SMD/SMT, Thickness=0.039inch, Voltage Rating (DC)=25V, Weight=7.1E-05oz, Width=0.8mm
C8: library part CC0805KRX7R9BB103, "YAGEO - CC0805KRX7R9BB103 - SMD Multilayer Ceramic Capacitor, 10000 pF, 50 V, 0805 [2012 Metric], ± 10%, X7R, CC Series", Case/Package=0805, Case Code (Metric)=2012, Dielectric=X7R, Insulation Resistance=100GR, Manufacturer 1=Yageo, Max Operating Temperature=125°C, Min Operating Temperature=-55°C, Package Quantity=1, Supplier Part Number 1=311-1136-1-ND, Tolerance=10%, Voltage=50V, Capacitance=10nF, Case Code (Imperial)=0805, ComponentLink1Description=https://datasheet.ciiva.com/11786/0900766b80d84f1d-11786119.pdf?src-supplier=RSComponents, ComponentLink1URL=https://datasheet.ciiva.com/11786/0900766b80d84f1d-11786119.pdf?src-supplier=RSComponents, ComponentLink2Description=https://datasheet.ciiva.com/25613/0900766b8027bcf6-25613113.pdf?src-supplier=RSComponents, ComponentLink2URL=https://datasheet.ciiva.com/25613/0900766b8027bcf6-25613113.pdf?src-supplier=RSComponents, ComponentLink3Description=https://datasheet.ciiva.com/144/mlccorderingcode-144533.pdf?src-supplier=Digi-Key, ComponentLink3URL=https://datasheet.ciiva.com/144/mlccorderingcode-144533.pdf?src-supplier=Digi-Key, ComponentLink4Description=https://datasheet.ciiva.com/144/mlccorderingcode-144534.pdf?src-supplier=Digi-Key, ComponentLink4URL=https://datasheet.ciiva.com/144/mlccorderingcode-144534.pdf?src-supplier=Digi-Key, ComponentLink5Description=https://datasheet.ciiva.com/16625/upy-gphc-x7r-6-3v-to-50v-8-16625548.pdf?src-supplier=Avnet+Europe, ComponentLink5URL=https://datasheet.ciiva.com/16625/upy-gphc-x7r-6-3v-to-50v-8-16625548.pdf?src-supplier=Avnet+Europe, ComponentLink6Description=https://datasheet.ciiva.com/46372/1784427-46372638.pdf?src-supplier=Element14, ComponentLink6URL=https://datasheet.ciiva.com/46372/1784427-46372638.pdf?src-supplier=Element14, ComponentLink7Description=https://datasheet.ciiva.com/46372/1734573-46372639.pdf?src-supplier=Element14, ComponentLink7URL=https://datasheet.ciiva.com/46372/1734573-46372639.pdf?src-supplier=Element14, ComponentLink8Description=https://datasheet.ciiva.com/144/mlccorderingcode-144532.pdf?src-supplier=Digi-Key, ComponentLink8URL=https://datasheet.ciiva.com/144/mlccorderingcode-144532.pdf?src-supplier=Digi-Key, ComponentLink9Description=https://datasheet.ciiva.com/22749/1489800-22749215.pdf?src-supplier=Element14, ComponentLink9URL=https://datasheet.ciiva.com/22749/1489800-22749215.pdf?src-supplier=Element14, Composition=Ceramic, Depth=1.25mm, Halogen Free="Halogen Free", Height=0.6mm, Lead Free="Lead Free", Length=2mm, Manufacturer Part Number 1=CC0805KRX7R9BB103, Material=Ceramic, Mount="Surface Mount", Number of Pins=2, Packaging="Tape and Reel", Pricing 1="1=0.11000, 10=0.07700, 100=0.03440, 500=0.02456, 1000=0.01930 (USD)", Radiation Hardening=No, REACH SVHC="No SVHC", RoHS=Yes, Stock 1=6420946, Supplier 1=Digi-Key, Termination=SMD/SMT, Thickness=0.024inch, Voltage Rating=50V, Voltage Rating (DC)=50V, Width=1.25mm
C11: library part 10TPB150ML, "CAP TANT POLY 150UF 10V 2917", Capacitance=10uF, Case/Package=0603, Case Code (Metric)=1608, Dielectric=X5R, Dielectric Material=Ceramic, Max Operating Temperature=85°C, Min Operating Temperature=-55°C, Package Quantity=1, Supplier Part Number 1=P16446CT-ND, Tolerance=20%, Voltage Rating=25V, Case Code (Imperial)=0603, ComponentLink1Description=http://components.arrow.com/part/dataview/0323_06887183?src-supplier=Arrow+Europe, ComponentLink1URL=http://components.arrow.com/part/dataview/0323_06887183?src-supplier=Arrow+Europe, ComponentLink2Description=http://www.farnell.com/datasheets/2792994.pdf?src-supplier=Farnell, ComponentLink2URL=http://www.farnell.com/datasheets/2792994.pdf?src-supplier=Farnell, ComponentLink3Description=http://www.farnell.com/datasheets/2291921.pdf?src-supplier=Avnet, ComponentLink3URL=http://www.farnell.com/datasheets/2291921.pdf?src-supplier=Avnet, ComponentLink4Description=http://www.farnell.com/datasheets/2792994.pdf?src-supplier=Newark, ComponentLink4URL=http://www.farnell.com/datasheets/2792994.pdf?src-supplier=Newark, ComponentLink5Description=http://www.farnell.com/datasheets/2291921.pdf?src-supplier=Newark, ComponentLink5URL=http://www.farnell.com/datasheets/2291921.pdf?src-supplier=Newark, ComponentLink6Description=http://www.farnell.com/datasheets/2792994.pdf?src-supplier=Element14, ComponentLink6URL=http://www.farnell.com/datasheets/2792994.pdf?src-supplier=Element14, ComponentLink7Description=http://www.farnell.com/datasheets/1913358.pdf?src-supplier=Element14, ComponentLink7URL=http://www.farnell.com/datasheets/1913358.pdf?src-supplier=Element14, ComponentLink8Description=https://product.tdk.com/info/en/catalog/datasheets/mlcc_commercial_general_en.pdf?src-supplier=Digi-Key, ComponentLink8URL=https://product.tdk.com/info/en/catalog/datasheets/mlcc_commercial_general_en.pdf?src-supplier=Digi-Key, ComponentLink9Description=http://www.farnell.com/datasheets/2291921.pdf?src-supplier=RSComponents, ComponentLink9URL=http://www.farnell.com/datasheets/2291921.pdf?src-supplier=RSComponents, ComponentLink10Description=http://www.farnell.com/datasheets/2291921.pdf?src-supplier=Verical, ComponentLink10URL=http://www.farnell.com/datasheets/2291921.pdf?src-supplier=Verical, ComponentLink11Description=http://www.farnell.com/datasheets/2291921.pdf?src-supplier=Mouser, ComponentLink11URL=http://www.farnell.com/datasheets/2291921.pdf?src-supplier=Mouser, ComponentLink12Description=http://www.farnell.com/datasheets/2291921.pdf?src-supplier=Quest, ComponentLink12URL=http://www.farnell.com/datasheets/2291921.pdf?src-supplier=Quest, ComponentLink13Description=http://www.farnell.com/datasheets/2291921.pdf?src-supplier=TTI, ComponentLink13URL=http://www.farnell.com/datasheets/2291921.pdf?src-supplier=TTI, Composition=Ceramic, Depth=0.8mm, Height=0.8mm, Lead Free="Lead Free", Length=1.6mm, Mount="Surface Mount", Packaging="Tape and Reel", REACH SVHC="No SVHC", RoHS=Yes, Supplier 1=Digi-Key, Termination=SMD/SMT, Thickness=0.039inch, Voltage Rating (DC)=25V, Weight=7.1E-05oz, Width=0.8mm
D1: "DIODE SCHOTTKY 200V 10A DPAK", Supplier Part Number 1=1655-1939-1-ND, Supplier 1=Digi-Key
J1 J3 J4 J6: Supplier Part Number 1=3M5717-ND, Supplier 1=Digi-Key
J2 J5: library part XT90
J7 J?1: Supplier Part Number 1=H122216-ND, Supplier 1=Digi-Key, Supplier 2=Digi-Key, Supplier Part Number 2=H122224-ND
L1: library part IHLP2020CZER1R5M01, "FIXED IND 1.5UH 7.2A 20.7 MOHM", Case/Package=Nonstandard, Current Rating=5.2A, DC Resistance (DCR)=26mR, Inductance=2.2uH, Manufacturer 1="Wurth Electronics", Manufacturer Part Number 1=74438357022, Max Operating Temperature=125°C, Min Operating Temperature=-40°C, Saturation Current=7A, Self Resonant Frequency=35MHz, Supplier Part Number 1=732-11201-1-ND, Test Frequency=100kHz, Tolerance=20%, ComponentLink1Description=http://www.farnell.com/datasheets/2579569.pdf?src-supplier=Farnell, ComponentLink1URL=http://www.farnell.com/datasheets/2579569.pdf?src-supplier=Farnell, ComponentLink2Description=https://katalog.we-online.de/pbs/datasheet/74438357022.pdf?src-supplier=Digi-Key, ComponentLink2URL=https://katalog.we-online.de/pbs/datasheet/74438357022.pdf?src-supplier=Digi-Key, ComponentLink3Description=http://www.farnell.com/datasheets/2579569.pdf?src-supplier=Newark, ComponentLink3URL=http://www.farnell.com/datasheets/2579569.pdf?src-supplier=Newark, Core Material=Metal,Composite, Mount="Surface Mount", Packaging="Cut Tape", Pricing 1="1=1.58000, 10=1.50700, 50=1.45200, 100=1.32000 (USD)", RoHS=No, Shielding=Shielded, Stock 1=1686, Supplier 1=Digi-Key
L2: library part 74438357022, "INDUCTOR, 2.2UH, 5.2A, 20%, SHIELDED", Case/Package=Nonstandard, Current Rating=5.2A, DC Resistance (DCR)=26mR, Manufacturer 1="Wurth Electronics", Max Operating Temperature=125°C, Min Operating Temperature=-40°C, Saturation Current=7A, Self Resonant Frequency=35MHz, Supplier Part Number 1=732-11201-1-ND, Test Frequency=100kHz, Tolerance=20%, ComponentLink1Description=http://www.farnell.com/datasheets/2579569.pdf?src-supplier=Farnell, ComponentLink1URL=http://www.farnell.com/datasheets/2579569.pdf?src-supplier=Farnell, ComponentLink2Description=https://katalog.we-online.de/pbs/datasheet/74438357022.pdf?src-supplier=Digi-Key, ComponentLink2URL=https://katalog.we-online.de/pbs/datasheet/74438357022.pdf?src-supplier=Digi-Key, ComponentLink3Description=http://www.farnell.com/datasheets/2579569.pdf?src-supplier=Newark, ComponentLink3URL=http://www.farnell.com/datasheets/2579569.pdf?src-supplier=Newark, Core Material=Metal,Composite, Inductance=2.2uH, Manufacturer Part Number 1=74438357022, Mount="Surface Mount", Packaging="Cut Tape", Pricing 1="1=1.58000, 10=1.50700, 50=1.45200, 100=1.32000 (USD)", RoHS=No, Shielding=Shielded, Stock 1=1686, Supplier 1=Digi-Key
L3: library part 7443551151, "FIXED IND 15.4UH 9A 14.8 MOHM", Case/Package=Nonstandard, Current Rating=5.2A, DC Resistance (DCR)=26mR, Inductance=2.2uH, Max Operating Temperature=125°C, Min Operating Temperature=-40°C, Saturation Current=7A, Self Resonant Frequency=35MHz, Supplier Part Number 1=732-1141-1-ND, Test Frequency=100kHz, Tolerance=20%, ComponentLink1Description=http://www.farnell.com/datasheets/2579569.pdf?src-supplier=Farnell, ComponentLink1URL=http://www.farnell.com/datasheets/2579569.pdf?src-supplier=Farnell, ComponentLink2Description=https://katalog.we-online.de/pbs/datasheet/74438357022.pdf?src-supplier=Digi-Key, ComponentLink2URL=https://katalog.we-online.de/pbs/datasheet/74438357022.pdf?src-supplier=Digi-Key, ComponentLink3Description=http://www.farnell.com/datasheets/2579569.pdf?src-supplier=Newark, ComponentLink3URL=http://www.farnell.com/datasheets/2579569.pdf?src-supplier=Newark, Core Material=Metal,Composite, Mount="Surface Mount", Packaging="Cut Tape", RoHS=No, Shielding=Shielded, Supplier 1=Digi-Key
R1: library part CRCW0402374KFKED, "RES SMD 374K OHM 1% 1/16W 0402", Capacitance=10uF, Case/Package=0603, Case Code (Metric)=1608, Dielectric=X5R, Dielectric Material=Ceramic, Max Operating Temperature=85°C, Min Operating Temperature=-55°C, Package Quantity=1, Supplier Part Number 1=541-374KLCT-ND, Tolerance=20%, Voltage Rating=25V, Case Code (Imperial)=0603, ComponentLink1Description=http://components.arrow.com/part/dataview/0323_06887183?src-supplier=Arrow+Europe, ComponentLink1URL=http://components.arrow.com/part/dataview/0323_06887183?src-supplier=Arrow+Europe, ComponentLink2Description=http://www.farnell.com/datasheets/2792994.pdf?src-supplier=Farnell, ComponentLink2URL=http://www.farnell.com/datasheets/2792994.pdf?src-supplier=Farnell, ComponentLink3Description=http://www.farnell.com/datasheets/2291921.pdf?src-supplier=Avnet, ComponentLink3URL=http://www.farnell.com/datasheets/2291921.pdf?src-supplier=Avnet, ComponentLink4Description=http://www.farnell.com/datasheets/2792994.pdf?src-supplier=Newark, ComponentLink4URL=http://www.farnell.com/datasheets/2792994.pdf?src-supplier=Newark, ComponentLink5Description=http://www.farnell.com/datasheets/2291921.pdf?src-supplier=Newark, ComponentLink5URL=http://www.farnell.com/datasheets/2291921.pdf?src-supplier=Newark, ComponentLink6Description=http://www.farnell.com/datasheets/2792994.pdf?src-supplier=Element14, ComponentLink6URL=http://www.farnell.com/datasheets/2792994.pdf?src-supplier=Element14, ComponentLink7Description=http://www.farnell.com/datasheets/1913358.pdf?src-supplier=Element14, ComponentLink7URL=http://www.farnell.com/datasheets/1913358.pdf?src-supplier=Element14, ComponentLink8Description=https://product.tdk.com/info/en/catalog/datasheets/mlcc_commercial_general_en.pdf?src-supplier=Digi-Key, ComponentLink8URL=https://product.tdk.com/info/en/catalog/datasheets/mlcc_commercial_general_en.pdf?src-supplier=Digi-Key, ComponentLink9Description=http://www.farnell.com/datasheets/2291921.pdf?src-supplier=RSComponents, ComponentLink9URL=http://www.farnell.com/datasheets/2291921.pdf?src-supplier=RSComponents, ComponentLink10Description=http://www.farnell.com/datasheets/2291921.pdf?src-supplier=Verical, ComponentLink10URL=http://www.farnell.com/datasheets/2291921.pdf?src-supplier=Verical, ComponentLink11Description=http://www.farnell.com/datasheets/2291921.pdf?src-supplier=Mouser, ComponentLink11URL=http://www.farnell.com/datasheets/2291921.pdf?src-supplier=Mouser, ComponentLink12Description=http://www.farnell.com/datasheets/2291921.pdf?src-supplier=Quest, ComponentLink12URL=http://www.farnell.com/datasheets/2291921.pdf?src-supplier=Quest, ComponentLink13Description=http://www.farnell.com/datasheets/2291921.pdf?src-supplier=TTI, ComponentLink13URL=http://www.farnell.com/datasheets/2291921.pdf?src-supplier=TTI, Composition=Ceramic, Depth=0.8mm, Height=0.8mm, Lead Free="Lead Free", Length=1.6mm, Mount="Surface Mount", Packaging="Tape and Reel", REACH SVHC="No SVHC", RoHS=Yes, Supplier 1=Digi-Key, Termination=SMD/SMT, Thickness=0.039inch, Voltage Rating (DC)=25V, Weight=7.1E-05oz, Width=0.8mm
R2 R3: library part CRCW0402100KFKED, "RES SMD 100K OHM 1% 1/16W 0402", Capacitance=10uF, Case/Package=0603, Case Code (Metric)=1608, Dielectric=X5R, Dielectric Material=Ceramic, Max Operating Temperature=85°C, Min Operating Temperature=-55°C, Package Quantity=1, Supplier Part Number 1=541-100KLCT-ND, Tolerance=20%, Voltage Rating=25V, Case Code (Imperial)=0603, ComponentLink1Description=http://components.arrow.com/part/dataview/0323_06887183?src-supplier=Arrow+Europe, ComponentLink1URL=http://components.arrow.com/part/dataview/0323_06887183?src-supplier=Arrow+Europe, ComponentLink2Description=http://www.farnell.com/datasheets/2792994.pdf?src-supplier=Farnell, ComponentLink2URL=http://www.farnell.com/datasheets/2792994.pdf?src-supplier=Farnell, ComponentLink3Description=http://www.farnell.com/datasheets/2291921.pdf?src-supplier=Avnet, ComponentLink3URL=http://www.farnell.com/datasheets/2291921.pdf?src-supplier=Avnet, ComponentLink4Description=http://www.farnell.com/datasheets/2792994.pdf?src-supplier=Newark, ComponentLink4URL=http://www.farnell.com/datasheets/2792994.pdf?src-supplier=Newark, ComponentLink5Description=http://www.farnell.com/datasheets/2291921.pdf?src-supplier=Newark, ComponentLink5URL=http://www.farnell.com/datasheets/2291921.pdf?src-supplier=Newark, ComponentLink6Description=http://www.farnell.com/datasheets/2792994.pdf?src-supplier=Element14, ComponentLink6URL=http://www.farnell.com/datasheets/2792994.pdf?src-supplier=Element14, ComponentLink7Description=http://www.farnell.com/datasheets/1913358.pdf?src-supplier=Element14, ComponentLink7URL=http://www.farnell.com/datasheets/1913358.pdf?src-supplier=Element14, ComponentLink8Description=https://product.tdk.com/info/en/catalog/datasheets/mlcc_commercial_general_en.pdf?src-supplier=Digi-Key, ComponentLink8URL=https://product.tdk.com/info/en/catalog/datasheets/mlcc_commercial_general_en.pdf?src-supplier=Digi-Key, ComponentLink9Description=http://www.farnell.com/datasheets/2291921.pdf?src-supplier=RSComponents, ComponentLink9URL=http://www.farnell.com/datasheets/2291921.pdf?src-supplier=RSComponents, ComponentLink10Description=http://www.farnell.com/datasheets/2291921.pdf?src-supplier=Verical, ComponentLink10URL=http://www.farnell.com/datasheets/2291921.pdf?src-supplier=Verical, ComponentLink11Description=http://www.farnell.com/datasheets/2291921.pdf?src-supplier=Mouser, ComponentLink11URL=http://www.farnell.com/datasheets/2291921.pdf?src-supplier=Mouser, ComponentLink12Description=http://www.farnell.com/datasheets/2291921.pdf?src-supplier=Quest, ComponentLink12URL=http://www.farnell.com/datasheets/2291921.pdf?src-supplier=Quest, ComponentLink13Description=http://www.farnell.com/datasheets/2291921.pdf?src-supplier=TTI, ComponentLink13URL=http://www.farnell.com/datasheets/2291921.pdf?src-supplier=TTI, Composition=Ceramic, Depth=0.8mm, Height=0.8mm, Lead Free="Lead Free", Length=1.6mm, Mount="Surface Mount", Packaging="Tape and Reel", REACH SVHC="No SVHC", RoHS=Yes, Supplier 1=Digi-Key, Termination=SMD/SMT, Thickness=0.039inch, Voltage Rating (DC)=25V, Weight=7.1E-05oz, Width=0.8mm
R4: library part CRCW0402100KFKED, "RES SMD 100K OHM 1% 1/16W 0402", Capacitance=10uF, Case/Package=0603, Case Code (Metric)=1608, Dielectric=X5R, Dielectric Material=Ceramic, Max Operating Temperature=85°C, Min Operating Temperature=-55°C, Package Quantity=1, Tolerance=20%, Voltage Rating=25V, Case Code (Imperial)=0603, ComponentLink1Description=http://components.arrow.com/part/dataview/0323_06887183?src-supplier=Arrow+Europe, ComponentLink1URL=http://components.arrow.com/part/dataview/0323_06887183?src-supplier=Arrow+Europe, ComponentLink2Description=http://www.farnell.com/datasheets/2792994.pdf?src-supplier=Farnell, ComponentLink2URL=http://www.farnell.com/datasheets/2792994.pdf?src-supplier=Farnell, ComponentLink3Description=http://www.farnell.com/datasheets/2291921.pdf?src-supplier=Avnet, ComponentLink3URL=http://www.farnell.com/datasheets/2291921.pdf?src-supplier=Avnet, ComponentLink4Description=http://www.farnell.com/datasheets/2792994.pdf?src-supplier=Newark, ComponentLink4URL=http://www.farnell.com/datasheets/2792994.pdf?src-supplier=Newark, ComponentLink5Description=http://www.farnell.com/datasheets/2291921.pdf?src-supplier=Newark, ComponentLink5URL=http://www.farnell.com/datasheets/2291921.pdf?src-supplier=Newark, ComponentLink6Description=http://www.farnell.com/datasheets/2792994.pdf?src-supplier=Element14, ComponentLink6URL=http://www.farnell.com/datasheets/2792994.pdf?src-supplier=Element14, ComponentLink7Description=http://www.farnell.com/datasheets/1913358.pdf?src-supplier=Element14, ComponentLink7URL=http://www.farnell.com/datasheets/1913358.pdf?src-supplier=Element14, ComponentLink8Description=https://product.tdk.com/info/en/catalog/datasheets/mlcc_commercial_general_en.pdf?src-supplier=Digi-Key, ComponentLink8URL=https://product.tdk.com/info/en/catalog/datasheets/mlcc_commercial_general_en.pdf?src-supplier=Digi-Key, ComponentLink9Description=http://www.farnell.com/datasheets/2291921.pdf?src-supplier=RSComponents, ComponentLink9URL=http://www.farnell.com/datasheets/2291921.pdf?src-supplier=RSComponents, ComponentLink10Description=http://www.farnell.com/datasheets/2291921.pdf?src-supplier=Verical, ComponentLink10URL=http://www.farnell.com/datasheets/2291921.pdf?src-supplier=Verical, ComponentLink11Description=http://www.farnell.com/datasheets/2291921.pdf?src-supplier=Mouser, ComponentLink11URL=http://www.farnell.com/datasheets/2291921.pdf?src-supplier=Mouser, ComponentLink12Description=http://www.farnell.com/datasheets/2291921.pdf?src-supplier=Quest, ComponentLink12URL=http://www.farnell.com/datasheets/2291921.pdf?src-supplier=Quest, ComponentLink13Description=http://www.farnell.com/datasheets/2291921.pdf?src-supplier=TTI, ComponentLink13URL=http://www.farnell.com/datasheets/2291921.pdf?src-supplier=TTI, Composition=Ceramic, Depth=0.8mm, Height=0.8mm, Lead Free="Lead Free", Length=1.6mm, Mount="Surface Mount", Packaging="Tape and Reel", REACH SVHC="No SVHC", RoHS=Yes, Termination=SMD/SMT, Thickness=0.039inch, Voltage Rating (DC)=25V, Weight=7.1E-05oz, Width=0.8mm